# EAGLE board screen.brd123 (EAGLE 9.6.1)
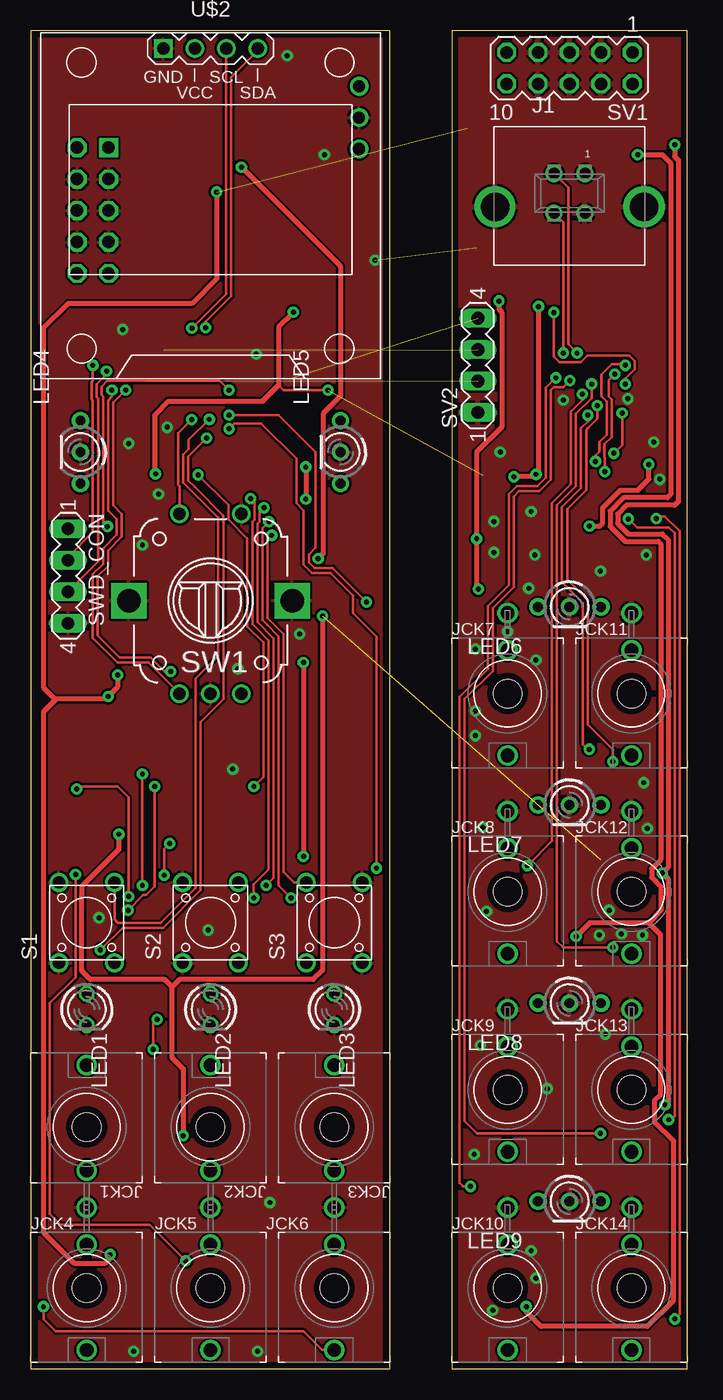
[diagram p0: board, top side]
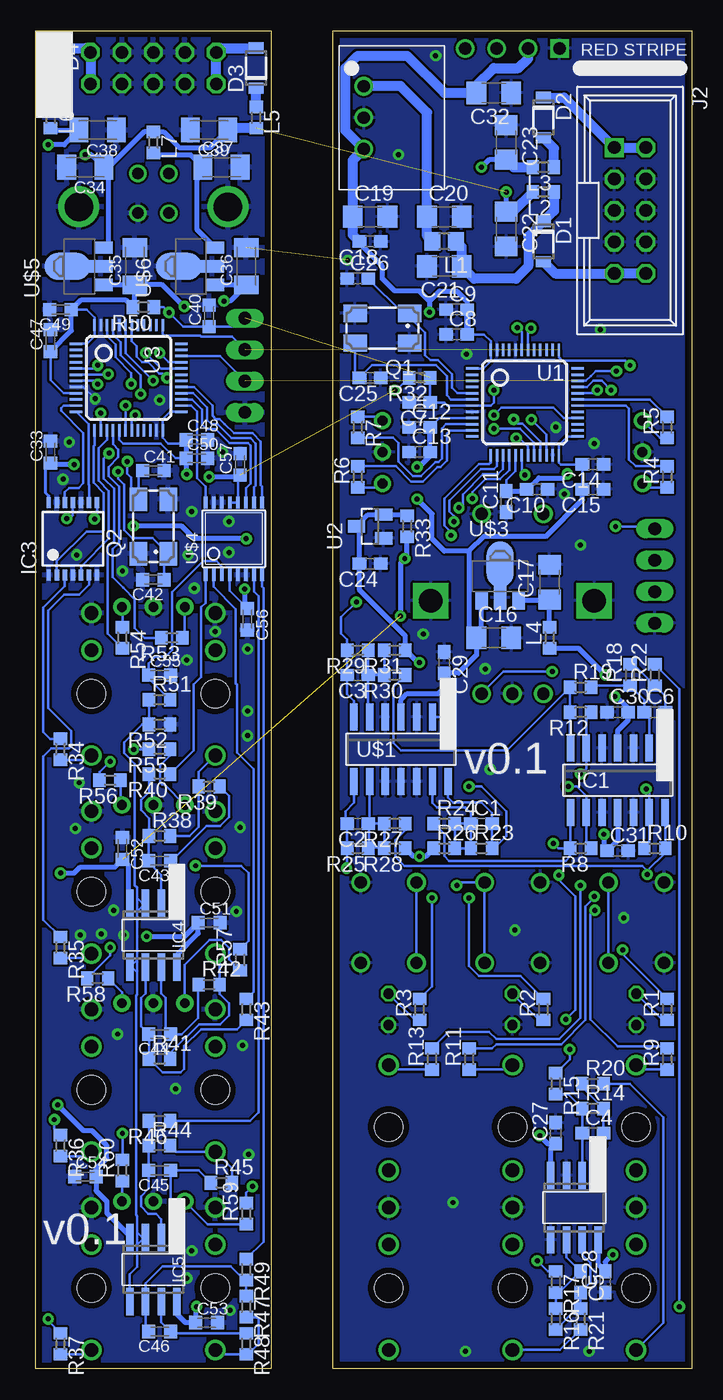
[diagram p1: board, bottom side, seen from below]

Size 53 x 108 mm. Coordinates in mm from the lower left corner, seen from the top.
Outline: 0,0 29,0 29,108 0,108 0,0
Outline: 34,0 53,0 53,108 34,108 34,0
Copper layers (1*16): Top 0.035mm / dielectric 1.5mm / Bottom 0.035mm
Design rules "PCBCart-Standard *": minimum track width 8mil, minimum drill 0.4mm, track to track 7mil, track to pad 7mil, pad to pad 7mil, via to via 7mil, smd to smd 7mil, copper to edge 20mil, drill to drill 8mil, minimum pad ring 8mil, minimum via ring 10mil, stop-mask expansion 3mil, vias tented up to drill 25mil, thermal gap 8mil
bKeepout: area 36.5,101.5 to 50.5,108

## Footprints (pad centres in the part's own frame; a part is rotated, then mirrored left to right if it is on the bottom)
C0603 = smd 1.1 x 1: 1 -0.85,0; 2 0.85,0
C1206 = smd 1.6 x 1.8: 1 -1.4,0; 2 1.4,0
C0603K = smd 1.05 x 1.08: 1 -0.875,0; 2 0.875,0
C1206K = smd 1.5 x 2: 1 -1.5,0; 2 1.5,0
SOD123FL = smd 0.91 x 1.22: A 1.625,0; C -1.625,0
SO14 = smd 0.6 x 2.2: 1 -3.81,-2.6; 2 -2.54,-2.6; 3 -1.27,-2.6; 4 0,-2.6; 5 1.27,-2.6; 6 2.54,-2.6; 7 3.81,-2.6; 8 3.81,2.6; 9 2.54,2.6; 10 1.27,2.6; 11 0,2.6; 12 -1.27,2.6; 13 -2.54,2.6; 14 -3.81,2.6
SO08 = smd 0.6 x 2.2: 1 -1.905,-2.6; 2 -0.635,-2.6; 3 0.635,-2.6; 4 1.905,-2.6; 5 1.905,2.6; 6 0.635,2.6; 7 -0.635,2.6; 8 -1.905,2.6
TSSOP14 = smd 0.35 x 0.9: 1 -1.95,-2.925; 2 -1.3,-2.925; 3 -0.65,-2.925; 4 0,-2.925; 5 0.65,-2.925; 6 1.3,-2.925; 7 1.95,-2.925; 8 1.95,2.925; 9 1.3,2.925; 10 0.65,2.925; 11 0,2.925; 12 -0.65,2.925; 13 -1.3,2.925; 14 -1.95,2.925
61400413321 = drill 0.92: 1 1.25,0; 2 -1.25,0; 3 -1.25,-3.2; 4 1.25,-3.2 | drill 2.3: SHELL -6.02,-2.7; SHELL1 6.02,-2.7
PINSHRD_PTH_2X05 = drill 1.016 square: 1 -5.08,-1.27 | drill 1.016 octagon: 2 -5.08,1.27; 3 -2.54,-1.27; 4 -2.54,1.27; 5 0,-1.27; 6 0,1.27; 7 2.54,-1.27; 8 2.54,1.27; 9 5.08,-1.27; 10 5.08,1.27
WQP-PJ301M-12_JACK = drill 1.1: P$1_TIP 0,5; P$2_SWITCH 0,-3.5; P$3_SLEEVE 0,-6.5 | hole 2.286: 0,0
R0805 = smd 1.3 x 1.5: 1 -0.95,0; 2 0.95,0
R0603 = smd 1 x 1.1: 1 -0.85,0; 2 0.85,0
LED3MM = drill 0.813 octagon: A -1.27,0; K 1.27,0
DUOLED-A-3MM = drill 0.8 pad 1.4: 1 -2.54,0; 2 0,0; 3 2.54,0
CTS406 = smd 1.9 x 1.4: 1 -2.2,-1.2; 2 2.2,-1.2; 3 2.2,1.2; 4 -2.2,1.2
TACT_SWITCH_6MM = drill 1: P$1 -3.25,-2.25; P$2 3.25,-2.25; P$3 -3.25,2.25; P$4 3.25,2.25
MA05-2 = drill 1.016 octagon: 1 -5.08,-1.27; 2 -5.08,1.27; 3 -2.54,-1.27; 4 -2.54,1.27; 5 0,-1.27; 6 0,1.27; 7 2.54,-1.27; 8 2.54,1.27; 9 5.08,-1.27; 10 5.08,1.27
MA04-1 = drill 1.016 long: 1 -3.81,0; 2 -1.27,0; 3 1.27,0; 4 3.81,0
PEC12_INCREMENTAL_ENCODER = drill 1: A -2.5,-7.5; B 2.5,-7.5; C 0,-7.5; P1 -2.5,7; P2 2.5,7 | drill 1.9 square: GND@1 -6.6,0; GND@2 6.6,0
LQFP48 = smd 1 x 0.2: 1 -4.25,2.75; 2 -4.25,2.25; 3 -4.25,1.75; 4 -4.25,1.25; 5 -4.25,0.75; 6 -4.25,0.25; 7 -4.25,-0.25; 8 -4.25,-0.75; 9 -4.25,-1.25; 10 -4.25,-1.75; 11 -4.25,-2.25; 12 -4.25,-2.75; 25 4.25,-2.75; 26 4.25,-2.25; 27 4.25,-1.75; 28 4.25,-1.25; 29 4.25,-0.75; 30 4.25,-0.25; 31 4.25,0.25; 32 4.25,0.75; 33 4.25,1.25; 34 4.25,1.75; 35 4.25,2.25; 36 4.25,2.75 | smd 0.2 x 1: 13 -2.75,-4.25; 14 -2.25,-4.25; 15 -1.75,-4.25; 16 -1.25,-4.25; 17 -0.75,-4.25; 18 -0.25,-4.25; 19 0.25,-4.25; 20 0.75,-4.25; 21 1.25,-4.25; 22 1.75,-4.25; 23 2.25,-4.25; 24 2.75,-4.25; 37 2.75,4.25; 38 2.25,4.25; 39 1.75,4.25; 40 1.25,4.25; 41 0.75,4.25; 42 0.25,4.25; 43 -0.25,4.25; 44 -0.75,4.25; 45 -1.25,4.25; 46 -1.75,4.25; 47 -2.25,4.25; 48 -2.75,4.25
SOT-23 = smd 1 x 1.4: 1 -0.95,-1.1; 2 0.95,-1.1; 3 0,1.1
TO-220_RECOM = drill 1: 1 -2.54,0; 2 0,0; 3 2.54,0
DISPLAY-OLED-128X64-I2C = drill 1 square: 1 -3.81,12.7 | drill 1: 2 -1.27,12.7; 3 1.27,12.7; 4 3.81,12.7
SOT89 = smd 1 x 1.5: 1 -1.499,-1.981; 3 1.499,-1.981 | smd 1 x 2: 2 0,-1.727 | smd 2.2 x 3.7: 2@1 0,0.94
TSSOP16 = smd 0.305 x 0.991: 1 -2.275,-2.918; 2 -1.625,-2.918; 3 -0.975,-2.918; 4 -0.325,-2.918; 5 0.325,-2.918; 6 0.975,-2.918; 7 1.625,-2.918; 8 2.275,-2.918; 9 2.275,2.918; 10 1.625,2.918; 11 0.975,2.918; 12 0.325,2.918; 13 -0.325,2.918; 14 -0.975,2.918; 15 -1.625,2.918; 16 -2.275,2.918

## Placement (x,y rotation side)
C1  18p  [C0603]  17,44 0 bottom
C2  18p  [C0603]  27,44 180 bottom
C3  18p  [C0603]  27,56 180 bottom
C4  18p  [C0603]  8,19 0 bottom
C5  18p  [C0603]  9,7 270 bottom
C6  18p  [C0603]  3,53 0 bottom
C7  0.1uF  [C0603]  22,78 180 bottom
C8  0.1uF  [C0603]  19,83.5 0 bottom
C9  0.1uF  [C0603]  19,85.5 0 bottom
C10  1uF  [C0603]  12.5,71 180 bottom
C11  1uF  [C0603]  15,70 90 bottom
C12  0.1uF  [C0603]  22,76 0 bottom
C13  1uF  [C0603]  22,74 0 bottom
C14  1uF  [C0603]  8,73 180 bottom
C15  0.1uF  [C0603]  8,71 180 bottom
C16  10uF  [C1206]  16,59 0 bottom
C17  22uF  [C1206]  11.5,63.5 90 bottom
C18  0.1uF  [C0603]  26,91 180 bottom
C19  10uF  [C1206]  26,93 0 bottom
C20  22uF  [C1206]  20,93 0 bottom
C21  22uF  [C1206]  20,89 180 bottom
C22  22uF  [C1206]  15,92 270 bottom
C23  22uF  [C1206]  15,99 270 bottom
C24  1uF  [C0603]  26,65 180 bottom
C25  18pF  [C0603]  26,80 180 bottom
C26  18pF  [C0603]  27,88 0 bottom
C27  0.1uF  [C0603]  11,19 90 bottom
C28  0.1uF  [C0603]  7,7 90 bottom
C29  0.1uF  [C0603]  20,57 270 bottom
C30  0.1uF  [C0603]  6,53 0 bottom
C31  0.1uF  [C0603]  6,41.8 0 bottom
C32  22uF  [C1206]  16,103 180 bottom
C33  0.1uF  [C0603K]  51.8,74 90 bottom
C34  22uF  [C1206K]  49,97 180 bottom
C35  22uF  [C1206K]  45,89 90 bottom
C36  22uF  [C1206K]  36,89 90 bottom
C37  22uF  [C1206K]  38,97 0 bottom
C38  22uF  [C1206K]  48,100 180 bottom
C39  22uF  [C1206K]  39,100 180 bottom
C40  0.1uF  [C0603K]  39,85 90 bottom
C41  18pF  [C0603K]  43.5,72.5 0 bottom
C42  18pF  [C0603K]  43.5,63.7 180 bottom
C43  18pF  [C0603K]  43,41 180 bottom
C44  18pF  [C0603K]  43,27 180 bottom
C45  18pF  [C0603K]  43,16 180 bottom
C46  18pF  [C0603K]  43,3 180 bottom
C47  1uF  [C0603K]  51.8,83 90 bottom
C48  1uF  [C0603K]  40,75 0 bottom
C49  1uF  [C0603K]  51,85.5 180 bottom
C50  1uF  [C0603K]  40,73.5 0 bottom
C51  0.1uF  [C0603K]  39,36 0 bottom
C52  0.1uF  [C0603K]  46,42 270 bottom
C53  0.1uF  [C0603K]  39.2,3.7 0 bottom
C54  0.1uF  [C0603K]  49,15.5 0 bottom
C55  1uF  [C0603K]  43,56 0 bottom
C56  1uF  [C0603K]  35.9,60.5 270 bottom
C57  0.1uF  [C0603K]  36.5,73 90 bottom
D1  SMF5.0AT1  [SOD123FL]  12,91 270 bottom
D2  SMF5.0AT1  [SOD123FL]  12,101 270 bottom
D3  SMF5.0AT1  [SOD123FL]  35.2,105 90 bottom
D4  SMF5.0AT1  [SOD123FL]  51.8,105 270 bottom
IC1  TL074D  [SO14]  6,47.5 180 bottom
IC2  TL072  [SO08]  9.5,13 180 bottom
IC3  74ABT125PW  [TSSOP14]  50,67 0 bottom
IC4  TL072  [SO08]  43.5,35 180 bottom
IC5  TL072  [SO08]  43.5,8 180 bottom
J1  [61400413321]  43.5,96.5 0 top
J2  CON_HEADER_2X05-PTH+SHROUDED_A  [PINSHRD_PTH_2X05]  5,93.5 270 bottom
JCK1  THONKICONNNEW  [WQP-PJ301M-12_JACK]  4.5,19.5 0 top
JCK2  THONKICONNNEW  [WQP-PJ301M-12_JACK]  14.5,19.5 0 top
JCK3  THONKICONNNEW  [WQP-PJ301M-12_JACK]  24.5,19.5 0 top
JCK4  THONKICONNNEW  [WQP-PJ301M-12_JACK]  4.5,6.5 180 top
JCK5  THONKICONNNEW  [WQP-PJ301M-12_JACK]  14.5,6.5 180 top
JCK6  THONKICONNNEW  [WQP-PJ301M-12_JACK]  24.5,6.5 180 top
JCK7  THONKICONNNEW  [WQP-PJ301M-12_JACK]  38.5,54.5 180 top
JCK8  THONKICONNNEW  [WQP-PJ301M-12_JACK]  38.5,38.5 180 top
JCK9  THONKICONNNEW  [WQP-PJ301M-12_JACK]  38.5,22.5 180 top
JCK10  THONKICONNNEW  [WQP-PJ301M-12_JACK]  38.5,6.5 180 top
JCK11  THONKICONNNEW  [WQP-PJ301M-12_JACK]  48.5,54.5 180 top
JCK12  THONKICONNNEW  [WQP-PJ301M-12_JACK]  48.5,38.5 180 top
JCK13  THONKICONNNEW  [WQP-PJ301M-12_JACK]  48.5,22.5 180 top
JCK14  THONKICONNNEW  [WQP-PJ301M-12_JACK]  48.5,6.5 180 top
L1  33u  [R0805]  20,91 180 bottom
L2  [R0603]  12,95 180 bottom
L3  [R0603]  12,97 180 bottom
L4  [R0603]  11.5,59 90 bottom
L5  [R0603]  35.2,101 270 bottom
L6  [R0603]  51.8,101 270 bottom
L7  [R0603]  43.5,99 270 bottom
LED1  [LED3MM]  4.5,29 270 top
LED2  [LED3MM]  14.5,29 270 top
LED3  [LED3MM]  24.5,29 270 top
LED4  L-115WEGW-CA  [DUOLED-A-3MM]  4,74 90 top
LED5  L-115WEGW-CA  [DUOLED-A-3MM]  25,74 90 top
LED6  L-115WEGW-CA  [DUOLED-A-3MM]  43.5,61.5 180 top
LED7  L-115WEGW-CA  [DUOLED-A-3MM]  43.5,45.5 180 top
LED8  L-115WEGW-CA  [DUOLED-A-3MM]  43.5,29.5 180 top
LED9  L-115WEGW-CA  [DUOLED-A-3MM]  43.5,13.5 180 top
Q1  CRYSTAL  [CTS406]  25,84 180 bottom
Q2  CRYSTAL  [CTS406]  43.5,68 90 bottom
R1  270  [R0603]  2,29 90 bottom
R2  270  [R0603]  12,29 90 bottom
R3  270  [R0603]  22,29 90 bottom
R4  270  [R0603]  2,72 90 bottom
R5  270  [R0603]  2,76 90 bottom
R6  270  [R0603]  27,72 90 bottom
R7  270  [R0603]  27,76 270 bottom
R8  100k 0.1%  [R0603]  9,42 180 bottom
R9  100k 0.1%  [R0603]  2,25 90 bottom
R10  100k 0.1%  [R0603]  3,42 0 bottom
R11  100k 0.1%  [R0603]  18,25 90 bottom
R12  100k 0.1%  [R0603]  9,53 180 bottom
R13  100k 0.1%  [R0603]  21,25 90 bottom
R14  100k 0.1%  [R0603]  8,21 0 bottom
R15  100k 0.1%  [R0603]  11,23 270 bottom
R16  100k 0.1%  [R0603]  11,4 270 bottom
R17  100k 0.1%  [R0603]  11,7 270 bottom
R18  100k 0.1%  [R0603]  5,56 90 bottom
R19  100k 0.1%  [R0603]  9,55 0 bottom
R20  1k  [R0603]  8,23 0 bottom
R21  1k  [R0603]  9,4 270 bottom
R22  1k  [R0603]  3,56 90 bottom
R23  20k  [R0603]  17,42 0 bottom
R24  120k  [R0603]  20,44 0 bottom
R25  20k  [R0603]  27,42 180 bottom
R26  120k  [R0603]  20,42 0 bottom
R27  120k  [R0603]  24,44 180 bottom
R28  120k  [R0603]  24,42 180 bottom
R29  20k  [R0603]  27,58 180 bottom
R30  120k  [R0603]  24,56 180 bottom
R31  120k  [R0603]  24,58 180 bottom
R32  10k  [R0603]  22,80 180 bottom
R33  4.7k  [R0603]  23,68 270 bottom
R34  1k  [R0603]  51,50 270 bottom
R35  1k  [R0603]  51,34 270 bottom
R36  1k  [R0603]  51,18 270 bottom
R37  1k  [R0603]  51,2 270 bottom
R38  100k  [R0603]  43,43 0 bottom
R39  1k  [R0603]  39,47 180 bottom
R40  39k  [R0603]  43,48 180 bottom
R41  100k  [R0603]  43,25 0 bottom
R42  1k  [R0603]  39,31 0 bottom
R43  39k  [R0603]  36,29 270 bottom
R44  100k  [R0603]  43,18 0 bottom
R45  1k  [R0603]  38,15 0 bottom
R46  39k  [R0603]  43,20 180 bottom
R47  100k  [R0603]  36,5 270 bottom
R48  1k  [R0603]  36,2 270 bottom
R49  39k  [R0603]  36,8 270 bottom
R50  1k  [R0603]  44.3,85.7 180 bottom
R51  100k  [R0603]  43,54 0 bottom
R52  100k  [R0603]  43,52 180 bottom
R53  270  [R0603]  42,59 180 bottom
R54  270  [R0603]  46,59 270 bottom
R55  270  [R0603]  43,50 180 bottom
R56  270  [R0603]  47,47.5 180 bottom
R57  270  [R0603]  36.5,33 90 bottom
R58  270  [R0603]  48,31.5 180 bottom
R59  270  [R0603]  36,12.5 90 bottom
R60  270  [R0603]  46,16 90 bottom
S1  TACT_SWITCH_6MM  [TACT_SWITCH_6MM]  4.5,36 90 top
S2  TACT_SWITCH_6MM  [TACT_SWITCH_6MM]  14.5,36 90 top
S3  TACT_SWITCH_6MM  [TACT_SWITCH_6MM]  24.5,36 90 top
SV1  [MA05-2]  43.5,105 180 top
SV2  [MA04-1]  36.1,81 90 top
SW1  ENCODER_SW1-PEC12  [PEC12_INCREMENTAL_ENCODER]  14.5,62 0 top
SWD_CON  [MA04-1]  3,64 270 top
U1  STM32F373LQFP48  [LQFP48]  13.5,78 0 bottom
U2  IC_LM4040  [SOT-23]  26,68 90 bottom
U3  STM32F373LQFP48  [LQFP48]  45.5,80 0 bottom
U5  R-78E-0.5  [TO-220_RECOM]  26.5,101 270 bottom
U$1  MCP6004  [SO14]  23.5,50 180 bottom
U$2  DISPLAY-OLED-128X64-I2C  [DISPLAY-OLED-128X64-I2C]  14.5,93.9 0 top
U$3  LD2981ABUSOT89  [SOT89]  15.5,64 0 bottom
U$4  DAC8565  [TSSOP16]  37,67 0 bottom
U$5  LD2981ABUSOT89  [SOT89]  49.5,89 90 bottom
U$6  LD2981ABUSOT89  [SOT89]  40.5,89 90 bottom

## Library data of the parts
C1-C57 L1-L7 R1-R60 = resistor
D1-D4 = diode
IC1 IC2 IC4 IC5 U$1 = EurorackModularParts
IC3 = 74xx-eu
J1 = Wurth_Elektronik_Electromechanic_Input-Output_Connectors_rev19a
J2 = dp_devices
JCK1-JCK14 Q1 Q2 S1-S3 U1 U3 U5 U$3-U$6 = BitFox
LED1-LED9 = led
SV1 SV2 SWD_CON = con-lstb; OC_FARNELL: unknown; OC_NEWARK: unknown
SW1 U2 = dp_devices.v6
U$2 = diy-modules

## Nets
+5V: C33.1 C36.1 C56.1 IC3.14 U$4.4 U$6.1
+12V: C22.1 C28.2 C30.2 C34.1 C39.1 C51.1 C53.1 IC1.4 IC2.8 IC4.8 IC5.8 L2.2 L4.1 L5.2 L7.1 U$5.3
-12V: C23.2 C27.1 C31.1 C38.2 C52.2 C54.2 IC1.11 IC2.4 IC4.4 IC5.4 L3.2 L6.2 R33.2
ENC_A: SW1.B U1.32
ENC_B: SW1.A U1.33
ENC_SW: SW1.P1 U1.22
GATE_1: IC3.2 U3.13
GATE_2: IC3.5 U3.15
GATE_3: IC3.9 U3.12
GATE_4: IC3.12 U3.11
GLED_1: R4.2 U1.30
GLED_2: R6.2 U1.11
GND: C7.2 C8.1 C9.1 C10.1 C11.1 C12.1 C13.1 C14.1 C15.1 C16.2 C17.2 C18.1 C19.2 C20.2 C21.2 C22.2 C23.1 C24.1 C25.1 C26.1 C27.2 C28.1 C29.1 C30.1 C31.2 C32.1 C33.2 C34.2 C35.2 C36.2 C37.2 C38.1 C39.2 C40.2 C41.2 C42.2 C47.2 C48.2 C49.2 C50.2 C51.2 C52.1 C53.2 C54.1 C55.2 C56.2 C57.2 IC1.3 IC1.5 IC1.10 IC1.12 IC2.3 IC2.5 IC3.1 IC3.4 IC3.7 IC3.10 IC3.13 J1.4 J1.SHELL J1.SHELL1 J2.3 J2.4 J2.5 J2.6 J2.7 J2.8 JCK1.P$3_SLEEVE JCK2.P$3_SLEEVE JCK3.P$3_SLEEVE JCK4.P$3_SLEEVE JCK5.P$3_SLEEVE JCK6.P$3_SLEEVE JCK7.P$3_SLEEVE JCK8.P$3_SLEEVE JCK9.P$3_SLEEVE JCK10.P$3_SLEEVE JCK11.P$3_SLEEVE JCK12.P$3_SLEEVE JCK13.P$3_SLEEVE JCK14.P$3_SLEEVE LED1.K LED2.K LED3.K LED4.2 LED5.2 LED6.2 LED7.2 LED8.2 LED9.2 Q1.2 Q1.4 Q2.2 Q2.4 R52.1 S1.P$3 S1.P$4 S2.P$3 S2.P$4 S3.P$1 S3.P$2 SV1.3 SV1.4 SV1.5 SV1.6 SV1.7 SV1.8 SV2.1 SW1.C SW1.GND@1 SW1.GND@2 SW1.P2 SWD_CON.4 U1.8 U1.23 U1.44 U1.47 U2.1 U3.8 U3.23 U3.44 U3.47 U5.2 U$1.3 U$1.5 U$1.10 U$1.11 U$1.12 U$2.1 U$3.2 U$3.2@1 U$4.5 U$4.6 U$4.14 U$4.15 U$5.2 U$5.2@1 U$6.2 U$6.2@1
L1G: R54.2 U3.14
L1R: R53.2 U3.16
L2G: R56.2 U3.18
L2R: R55.2 U3.19
L3G: R58.2 U3.46
L3R: R57.2 U3.45
L4G: R60.2 U3.43
L4R: R59.2 U3.42
LED_1: R1.2 U1.19
LED_2: R2.2 U1.16
LED_3: R3.2 U1.14
N$1: IC1.9 R8.1 R9.2
N$2: IC1.13 R10.1 R11.2
N$3: LED1.A R1.1
N$4: LED2.A R2.1
N$5: LED3.A R3.1
N$6: LED4.1 R4.1
N$7: LED4.3 R5.1
N$8: C25.2 Q1.3 U1.6
N$9: C6.2 IC1.1 R18.2 R22.1
N$10: C1.1 R23.1 R24.2 R26.2 U$1.13
N$11: D2.C J2.1 J2.2
N$12: LED5.1 R6.1
N$13: LED5.3 R7.1
N$14: JCK1.P$1_TIP R9.1
N$15: JCK2.P$1_TIP R11.1
N$16: IC1.6 R12.1 R13.2
N$17: C4.2 IC2.1 R14.2 R20.1
N$18: JCK3.P$1_TIP R13.1
N$19: C4.1 IC2.2 R14.1 R15.2
N$20: U$1.1 U$1.2
N$21: C5.2 IC2.7 R16.2 R21.1
N$22: C5.1 IC2.6 R16.1 R17.2
N$23: C2.1 R25.1 R27.2 R28.2 U$1.9
N$24: IC3.3 R34.1
N$25: C6.1 IC1.2 R18.1 R19.2
N$26: D1.A J2.9 J2.10
N$27: C3.1 R29.1 R30.2 R31.2 U$1.6
N$28: JCK5.P$1_TIP R21.2
N$29: JCK4.P$1_TIP R20.2
N$30: JCK6.P$1_TIP R22.2
N$31: C21.1 D1.C L1.1 L2.1
N$32: C26.2 Q1.1 U1.5
N$33: C20.1 L1.2 U5.1
N$34: IC3.6 R35.1
N$35: IC3.8 R36.1
N$36: IC3.11 R37.1
N$37: JCK11.P$1_TIP R34.2
N$38: JCK12.P$1_TIP R35.2
N$39: JCK13.P$1_TIP R36.2
N$40: JCK14.P$1_TIP R37.2
N$41: C37.1 L7.2 U$6.3
N$42: D3.C L5.1
N$43: C17.1 L4.2 U$3.3
N$44: D2.A L3.1
N$45: D4.A L6.1
N$46: D4.C SV1.1 SV1.2
N$47: D3.A SV1.9 SV1.10
N$48: LED7.1 R56.1
N$49: LED7.3 R55.1
N$50: LED6.1 R54.1
N$51: LED6.3 R53.1
N$52: LED9.3 R59.1
N$53: LED9.1 R60.1
N$54: LED8.1 R58.1
N$55: LED8.3 R57.1
N$56: C42.1 Q2.1 U3.6
N$57: C41.1 Q2.3 U3.5
N$58: C43.2 IC4.2 R38.1 R40.2
N$59: C43.1 IC4.1 R39.1
N$60: JCK7.P$1_TIP R38.2 R39.2
N$61: C44.2 IC4.6 R41.1 R43.2
N$62: C44.1 IC4.7 R42.1
N$63: JCK8.P$1_TIP R41.2 R42.2
N$64: C45.2 IC5.2 R44.1 R46.2
N$65: C45.1 IC5.1 R45.1
N$66: JCK9.P$1_TIP R44.2 R45.2
N$67: C46.2 IC5.6 R47.1 R49.2
N$68: C46.1 IC5.7 R48.1
N$69: JCK10.P$1_TIP R47.2 R48.2
N$70: C55.1 R51.2 U$4.3
OUTA: R40.1 U$4.1
OUTB: R43.1 U$4.2
OUTC: R46.1 U$4.7
OUTD: R49.1 U$4.8
REF_BIAS: IC4.3 IC4.5 IC5.3 IC5.5 R51.1 R52.2
RESET: C7.1 C40.1 R32.1 R50.1 SV2.4 SWD_CON.1 U1.7 U3.7
RLED_1: R5.2 U1.31
RLED_2: R7.2 U1.10
SCR_SCL: U1.42 U$2.3
SCR_SDA: U1.43 U$2.4
SDADC_1: C1.2 R23.2 U1.18 U$1.14
SDADC_2: C2.2 R25.2 U1.20 U$1.8
SDADC_3: C3.2 R29.2 U1.28 U$1.7
SIGNAL_1: IC1.8 R8.2 R15.1 R24.1
SIGNAL_2: IC1.14 R10.2 R17.1 R27.1
SIGNAL_3: IC1.7 R12.2 R19.1 R30.1
SPI_LDAC: U3.26 U$4.16
SPI_MOSI: U3.27 U$4.11
SPI_SCK: U3.28 U$4.10
SPI_SYNC: U3.29 U$4.9
SW_1: S1.P$1 S1.P$2 U1.21
SW_2: S2.P$1 S2.P$2 U1.15
SW_3: S3.P$3 S3.P$4 U1.13
SWCLK: SV2.3 SWD_CON.2 U1.37 U3.37
SWDIO: SV2.2 SWD_CON.3 U1.34 U3.34
USB_DM: J1.2 U3.32
USB_DP: J1.3 U3.33
VCC: C12.2 C13.2 C14.2 C15.2 C16.1 C29.2 U1.9 U1.24 U1.25 U$1.4 U$3.1
VCCIO: C8.2 C9.2 C10.2 C11.2 C18.2 C19.1 C32.2 C35.1 C47.1 C48.1 C49.1 C50.1 C57.1 R32.2 R50.2 U1.1 U1.17 U1.48 U3.1 U3.9 U3.17 U3.24 U3.25 U3.48 U5.3 U$2.2 U$4.12 U$4.13 U$5.1
VREF_-10: C24.2 R26.1 R28.1 R31.1 R33.1 U2.2 U2.3

## Tracks (layer width: path | path; a pad name or v marks a point on that pad's centre or on a via)
+5V  (via drill 0.4)
  Top 0.406: v37.8,86.2 37.8,85.52 38.03,85.29 38.03,76.03 36,74 v36,67 36,63.06 v36.13,62.93 | v49.91,73 49.91,71.81 49.02,70.92 47.59,70.92 46.18,69.5 46.18,68.28 45.91,68.01 v45.12,68.01
  Bottom 0.203: C56.1 37.33,62.8 U$4.4
  Bottom 0.254: IC3.14 51.95,70.45 52.2,70.7 52.2,72.72 C33.1
  Bottom 0.406: U$6.1 C36.1 37.3,86.2 v37.8,86.2 | v36.13,62.93 36.13,61.61 C56.1 | v36,67 40.2,67 41.21,68.01 v45.12,68.01 | v49.91,73 51.67,73 C33.1
+12V  (via drill 0.4)  (1 unrouted)
  Top 0.406: v15,95 15,88 13,86 3,86 1,84 1,55 1.94,54.06 | 1.94,54.06 1.94,53.94 1,53 1,11 3.5,8.5 6,8.5 6.4,8.9 v6.4,9.2 | v7,56 7,55.03 v6.24,54.27 6.04,54.06 1.94,54.06 | v49,98 51,98 51.68,97.32 51.68,70.58 51.41,70.31 47.85,70.31 46.79,69.25 46.79,67.99 48,66.78 50.68,66.78 50.87,66.6 50.87,41.08 50.14,40.36 50.14,39.64 50.89,38.89 50.89,37 49.89,36 | v40,5 40,4.6 41.2,3.4 49.8,3.4 51.88,5.48 51.88,18.42 50.37,19.93 50.37,21.66 50.87,22.16 50.87,35.02 49.89,36 | v44.04,34.9 45.14,36 49.89,36
  Bottom 0.406: IC1.4 6,51.5 5.15,52.35 C30.2 5.15,53.28 6.13,54.27 v6.24,54.27 | C22.1 v15,95 | v7,56 9.15,58.15 L4.1 | IC2.8 7.59,8.45 C28.2 7,8.6 v6.4,9.2 | C39.1 38.91,98.59 41.42,98.59 42.67,99.85 L7.1 44.25,99.85 47.1,97 | 47.1,97 C34.1 48.5,98 v49,98 | U$5.3 47.1,90.92 47.1,97 | v44.04,34.9 40.98,34.9 C51.1 39.88,35.12 41.59,33.41 IC4.8 | IC5.8 41.59,4.39 40.9,3.7 C53.1 40.08,4.92 v40,5
  Bottom 0.813: L2.2 14.45,93.4 C22.1 | L5.2 37.35,100.15 C39.1
-12V  (via drill 0.4)  (1 unrouted)
  Top 0.406: v23.2,65.4 23.6,65.8 23.6,77.1 25,78.5 25,89 v17,97 | v23.54,60.76 23.54,32.14 23.5,32.1 22.8,31.4 12,31.4 11.4,30.8 | v12.3,18.8 12.3,24.2 11.4,25.1 11.4,30.8 | 11.4,30.8 10.8,31.4 4.8,31.4 4.11,32.09 4.11,32.2 4.11,38.2 4.11,38.91 7.1,41.9 v7.1,43.14 | v51.23,21.3 51.48,21.55 51.48,39.52 v51,40 51.48,40.48 51.48,66.92 51.01,67.39 48.25,67.39 47.4,68.24 47.4,69 48.1,69.7 51.99,69.7 52.29,70 52.29,97.57 52,97.86 v52,98.8
  Bottom 0.406: C23.2 16.4,97.6 v17,97 | IC2.4 11.4,17.75 C27.1 11.65,18.15 v12.3,18.8 | R33.2 23,65.6 v23.2,65.4 23.54,65.06 v23.54,60.76 | IC1.11 6,42.65 C31.1 7.1,42.05 v7.1,43.14 | L6.2 51.65,100 C38.2 50.7,98.8 v52,98.8 | v51,40 49.9,40 49.4,40.5 46.62,40.5 C52.2 45.51,40.63 45.51,37.7 IC4.4 | v51.23,21.3 49.12,19.2 48.46,19.2 47.27,18.01 47.27,16.99 48.12,16.13 C54.2 48.12,14.37 47.27,13.51 47.27,12.57 45.41,10.71 IC5.4
  Bottom 0.813: C23.2 14.4,97 L3.2
ENC_A  (via drill 0.4)
  Top 0.203: v11.29,56.29 10.79,56.29 9.67,57.41 7.17,57.41 5.41,59.17 5.41,63.99 6.22,64.81 6.22,66.05 7.33,67.16 7.33,69 6.63,69.7 6.63,78 v7.64,79.01
  Bottom 0.203: SW1.B 15.21,56.29 v11.29,56.29 | U1.32 7.94,78.75 7.68,79.01 v7.64,79.01
ENC_B  (via drill 0.4)
  Top 0.203: SW1.A 9.5,57 7,57 5,59 5,64.16 5.82,64.97 5.82,66.22 6.93,67.33 6.93,68.57 6.22,69.28 6.22,78.16 6.53,78.47 v6.53,79.01
  Bottom 0.203: 9,79.25 U1.33 | 9,79.25 8.47,79.25 | 8.47,79.25 7.96,79.77 7.29,79.77 v6.53,79.01 | 9,79.25 8.47,79.25
ENC_SW  (via drill 0.4)
  Top 0.203: SW1.P1 12,71.26 11.89,71.38 11.89,75.53 v12.98,76.62
  Bottom 0.203: v12.98,76.62 11.75,75.4 U1.22
GATE_1
  Bottom 0.203: IC3.2 51.3,65.2 48.9,67.6 47.6,67.6 47.5,67.7 47.5,68 47.5,70.7 48.34,71.54 48.34,74.48 48.25,74.57 U3.13
GATE_2
  Bottom 0.203: U3.15 47.25,74.99 47.93,74.31 47.93,71.7 47.09,70.87 47.09,67 47.1,67 49.35,64.75 IC3.5
GATE_3
  Bottom 0.203: U3.12 48.74,76.24 48.74,71.37 48.7,71.33 IC3.9
GATE_4
  Bottom 0.203: U3.11 50.75,77.75 50.95,77.55 50.95,77.36 49.15,75.55 49.15,71.5 49.55,71.1 50.3,71.1 50.65,70.75 IC3.12
GLED_1
  Bottom 0.203: U1.30 5.35,77.75 5.1,77.5 5.1,73.4 4.55,72.85 R4.2
GLED_2
  Bottom 0.203: U1.11 19.55,75.75 19.79,75.51 19.79,73.3 20.3,72.79 20.56,72.79 21.72,71.64 22.68,71.64 23.9,72.85 R6.2
GND  (via drill 0.4)  (1 unrouted)
  Bottom 0.203: v48.2,78.3 49.15,79.25 U3.8
  other vias: 11,76 10.3,70.6 7.9,74.7 9,66.5 16.3,48.4 21.7,59.3 18.3,1.4 8.3,1.4 19.3,13.4 14.3,35.4 7.4,83.9 20.7,106 5.5,36.4 18.2,81.9 23.7,98 27.8,89.5 16.7,56.5 37.9,74 35.9,58.1 43,78.2 36.5,43.7 36.3,26.1 41.7,22.6 35.8,17.3 40.4,9.5 40.8,7.3 50.3,74.8 50.8,71.8 46,64.4 49.7,65.7 37.3,4.7 35.9,53.1 35.9,51.1 40.4,69.2 37.4,68.4 37.4,65.9 36.8,36.9 49.5,47.3 46.4,27 38.5,59.5 40.8,57.2 40.2,63 40.7,65.7 49.4,35 46.7,37 47.7,35.1 49.8,43.6 45.9,35
  pour Bottom: 29,0 0,0 0,108 29,108
  pour Top: 29,0 0,0 0,108 29,108
  pour Bottom: 53,108 53,0 34,0 34,108
  pour Top: 53,108 53,0 34,0 34,108
L1G  (via drill 0.4)
  Top 0.203: v47.09,73.9 47.75,74.57 v47.75,77.15
  Bottom 0.203: R54.2 47.2,59.35 47.2,63 47.2,66.32 46.69,66.83 46.69,71 46.69,71.04 47.52,71.87 47.52,73.46 v47.09,73.9 | v47.75,77.15 U3.14
L1R
  Bottom 0.203: U3.16 46.75,74.64 46.33,74.22 46.33,73.59 47.12,72.8 47.12,72.04 46.28,71.2 46.28,66.66 46.79,66.15 46.79,63.89 45.95,63.05 45,62.1 45,59.8 44.2,59 R53.2
L2G  (via drill 0.4)
  Top 0.203: v47,49 47,50 45,52 45,62 43.31,63.69 43.31,69.38 44.84,70.92 44.84,75.77 45.04,75.96 45.76,76.68 v45.76,77.76
  Bottom 0.203: v47,49 47.85,48.15 R56.2 | U3.18 v45.75,77.75 v45.76,77.76
L2R  (via drill 0.4)
  Top 0.203: v44.97,76.97 44.97,76.47 44.44,75.94 44.44,71.08 42.9,69.55 42.9,63.52 44.59,61.83 44.59,50.41 45,50 v45.1,50
  Bottom 0.203: U3.19 45.25,76.69 v44.97,76.97 | v45.1,50 R55.2
L3G  (via drill 0.4)
  Top 0.203: v45.29,79.5 45.29,78.36 44.03,77.1 44.03,71.25 42.49,69.72 42.49,46 42.5,45.99 42.5,45.92 42.49,45.92 42.49,34.51 43,34 v47,34
  Bottom 0.203: U3.46 47.25,83.38 46.56,82.69 46.56,81.65 45.29,80.38 v45.29,79.5 | R58.2 47,33.35 v47,34
L3R  (via drill 0.4)
  Top 0.203: v44.53,78.68 44.53,78.18 43.62,77.27 43.62,71.42 42.09,69.89 42.09,42.59 v40.1,40.6
  Bottom 0.203: U3.45 46.75,83.45 46.16,82.86 46.16,81.82 44.53,80.2 v44.53,78.68 | R57.2 35.8,34.55 35.8,40 36.4,40.6 v40.1,40.6
L4G  (via drill 0.4)
  Top 0.203: v43.52,79.76 42.99,79.23 42.22,79.23 42.01,79.02 42.01,71.76 41.08,70.83 39.41,70.83 39,70.42 39,63.1 37.3,61.4 37.3,56.33 35.02,54.04 35.02,20 36.02,19 v46,19
  Bottom 0.203: U3.43 45.75,81.99 v43.52,79.76 | R60.2 v46,19
L4R  (via drill 0.4)
  Top 0.203: v42.41,79.99 41.6,79.18 41.6,71.93 40.91,71.24 39.24,71.24 38.59,70.59 38.59,63.27 36.89,61.57 36.89,56.49 34.61,54.21 34.61,15 34.91,14.7 v35.5,14.7
  Bottom 0.203: U3.42 45.25,82.95 44.87,82.57 44.87,81.69 44.43,81.24 43.93,81.24 43.03,80.34 42.76,80.34 v42.41,79.99 | v35.5,14.7 36,14.2 R59.2
LED_1  (via drill 0.4)
  Top 0.203: v5.6,33.8 7.39,35.59 10.66,35.59 13.71,38.65 13.71,52.22 15.55,54.06 15.55,68.38 15.54,68.39 15.54,68.87 13.21,71.21 12.7,71.71 12.7,73.63 v14.19,75.12
  Bottom 0.203: R1.2 5.6,33.45 v5.6,33.8 | U1.19 13.25,74.45 13.92,75.12 v14.19,75.12
LED_2  (via drill 0.4)
  Top 0.203: v18,38 18,39.1 19.19,40.29 19.19,58.79 17.88,60.09 17.88,68.39 18.05,68.56 18.05,69.94 v17.75,70.25
  Bottom 0.203: R2.2 13.85,31.7 17.19,31.7 18,32.51 v18,38 | U1.16 14.75,72.55 15.5,71.8 16.7,71.8 17.75,70.75 v17.75,70.25
LED_3  (via drill 0.4)
  Top 0.203: v21,38 20,39 20,59.12 19.06,60.06 | 19.06,60.06 18.69,60.43 | 19.06,60.06 18.69,60.43 | 18.69,60.43 18.69,67.86 v19.22,68.39
  Bottom 0.203: R3.2 21,30.85 v21,38 | U1.14 15.75,72.86 16,72.61 17.04,72.61 19.57,70.08 19.57,69.19 19.22,68.83 v19.22,68.39
N$1  (via drill 0.4)
  Top 0.203: v7.83,37 9.08,38.24 9.31,38.24 10,38.93 v10,47
  Bottom 0.203: R8.1 8.54,42.39 IC1.9 8.54,46.24 9.3,47 v10,47 | R9.2 2.15,26 6,26 8.19,28.19 8.19,36.65 v7.83,37
N$2  (via drill 0.4)
  Top 0.203: v7.88,38.12 7.88,46.12 7,47 3.9,47 v3.7,46.8
  Bottom 0.203: R10.1 3.46,42.39 IC1.13 3.46,46.56 v3.7,46.8 | R11.2 16.15,25.85 15.81,26.19 15.7,26.19 10.53,26.19 8.59,28.13 8.59,30 8.59,37 8.59,37.31 7.88,38.03 v7.88,38.12
N$3
  Bottom 0.203: LED1.A 2.38,28.15 R1.1
N$4
  Bottom 0.203: LED2.A 12.38,28.15 R2.1
N$5
  Bottom 0.203: LED3.A 22.38,28.15 R3.1
N$6
  Bottom 0.203: R4.1 3.69,71.15 LED4.1
N$7
  Bottom 0.203: LED4.3 2.61,75.15 R5.1
N$8
  Bottom 0.203: U1.6 19.45,78.25 19.79,78.59 19.79,80.12 20.67,81 25.85,81 C25.2 | 26.93,80.08 27.2,80.35 Q1.3
  Bottom 0.305: 26.93,80.08 C25.2
N$9
  Bottom 0.203: IC1.1 2.15,50.14 C6.2 2.15,54.3 R22.1 4.7,56.85 R18.2
N$10
  Bottom 0.203: C1.1 R24.2 R26.2 R23.1 C1.1 | C1.1 17.85,44.85 18.2,45.2 18.3,45.3 20.6,45.3 20.96,45.66 U$1.13
N$11
  Bottom 0.813: D2.C 10.31,102.62 J2.1 J2.2
N$12
  Bottom 0.203: R6.1 25.31,71.15 LED5.1
N$13
  Bottom 0.203: R7.1 25.31,76.85 LED5.3
N$14
  Bottom 0.203: R9.1 4.15,24.15 JCK1.P$1_TIP
N$15
  Bottom 0.203: R11.1 14.85,24.15 JCK2.P$1_TIP
N$16  (via drill 0.4)
  Top 0.203: v9,39 v9,48
  Bottom 0.203: R12.1 8.54,52.61 IC1.6 8.54,48.46 v9,48 | R13.2 19.65,27.2 16.4,27.2 15.8,26.6 10.7,26.6 9,28.3 v9,39
N$17
  Bottom 0.203: IC2.1 7.59,17.41 7,18 7,18.85 C4.2 R14.2 8.85,22.7 R20.1
N$18
  Bottom 0.203: JCK3.P$1_TIP 24.15,24.15 R13.1
N$19
  Bottom 0.203: IC2.2 8.87,18.98 C4.1 | C4.1 9,19 | R15.2 10,22.15 R14.1 C4.1
N$20
  Bottom 0.203: U$1.2 U$1.1
N$21
  Bottom 0.203: IC2.7 8.87,9.2 8.2,8.53 8.2,6.96 C5.2 | C5.2 8.65,6.15 | R16.2 9.3,4.85 R21.1 C5.2
N$22
  Bottom 0.203: R16.1 R17.2 10.7,6.15 C5.1 10.13,8.98 IC2.6
N$23
  Bottom 0.203: 26.07,44.08 C2.1 R27.2 R28.2 24.93,42.08 26.07,42.08 | 26.07,44.08 26.04,44.11 U$1.9 | R25.1 26.07,42.08 | 26.07,42.08 26.07,44.08
N$24
  Bottom 0.203: IC3.3 50.65,63.17 52.39,61.43 52.39,51.39 51.85,50.85 R34.1
N$25
  Bottom 0.203: IC1.2 3.46,52.61 C6.1 3.85,54 R18.1 8,55.15 R19.2
N$26
  Bottom 0.813: D1.A 11.04,88.42 J2.9 J2.10
N$27
  Bottom 0.203: C3.1 26.15,52.71 U$1.6 | C3.1 R29.1 | R31.2 R30.2 C3.1
N$28
  Bottom 0.203: R21.2 10.65,1.5 JCK5.P$1_TIP
N$29
  Bottom 0.203: JCK4.P$1_TIP 2.3,3.7 2.3,20.3 5,23 R20.2
N$30  (via drill 0.4)
  Top 0.203: JCK6.P$1_TIP 23.5,1.5 22,3 2,3 1.01,3.99 v1.01,5
  Bottom 0.203: v1.01,5 1.01,54.86 R22.2
N$31
  Bottom 0.813: L2.1 11.15,93.47 D1.C 13.22,91.41 13.22,89 14.22,88 17.6,88 C21.1 18.6,90.55 L1.1
N$32
  Bottom 0.203: U1.5 18.94,78.75 19.39,79.2 19.39,80.29 20.5,81.41 21.11,81.41 21.55,81.84 21.55,83.63 22.8,84.88 Q1.1 23.35,85.2 C26.2
N$33
  Bottom 0.813: L1.2 21.4,91.45 C20.1 21.4,101.4 23.54,103.54 U5.1
N$34
  Bottom 0.203: IC3.6 48.7,63.3 49.5,62.5 50.7,62.5 51.98,61.22 51.98,53.31 50.15,51.48 50.15,50.22 50.32,50.05 51.74,50.05 52.39,49.4 52.39,36.24 R35.1
N$35  (via drill 0.4)
  Top 0.203: v48.26,68.6 48.96,67.9 50,67.9 51.52,67.9 51.98,67.44 51.98,20.35 51.73,20.1 v51.5,20.1
  Bottom 0.203: IC3.8 48.05,68.81 v48.26,68.6 | v51.5,20.1 51.5,19.35 R36.1
N$36  (via drill 0.4)
  Top 0.203: v52,4 52.39,4.39 52.39,67.61 51.2,68.8 50.67,68.8 v50.5,68.63
  Bottom 0.203: IC3.11 50,68.9 50.27,68.63 v50.5,68.63 | v52,4 52,3.85 R37.1
N$37
  Bottom 0.203: R34.2 48.85,49.15 JCK11.P$1_TIP
N$38
  Bottom 0.203: R35.2 48.85,33.15 JCK12.P$1_TIP
N$39
  Bottom 0.203: R36.2 48.85,17.15 JCK13.P$1_TIP
N$40
  Bottom 0.203: R37.2 48.85,1.15 JCK14.P$1_TIP
N$41
  Bottom 0.406: L7.2 43.33,97.98 40.48,97.98 C37.1 39.5,96.5 40,96 40,91.98 U$6.3
N$42
  Bottom 0.813: L5.1 D3.C
N$43
  Bottom 0.406: L4.2 C17.1 11.58,62.02 U$3.3
N$44
  Bottom 0.813: L3.1 11.15,98.53 D2.A
N$45
  Bottom 0.813: D4.A L6.1
N$46
  Bottom 0.813: D4.C 48.94,106.62 SV1.1 SV1.2
N$47
  Bottom 0.813: D3.A 38.06,106.62 SV1.9 SV1.10
N$48
  Bottom 0.203: R56.1 46.15,45.61 LED7.1
N$49
  Bottom 0.203: R55.1 42.15,49.48 42.95,48.68 42.95,47.32 42.78,47.15 42.6,47.15 LED7.3
N$50
  Bottom 0.203: R54.1 46,61.46 LED6.1
N$51
  Bottom 0.203: R53.1 40.96,59.19 LED6.3
N$52
  Bottom 0.203: LED9.3 39.11,11.65 R59.1
N$53
  Bottom 0.203: R60.1 46.04,15.11 LED9.1
N$54
  Bottom 0.203: R58.1 46.04,30.39 LED8.1
N$55
  Bottom 0.203: R57.1 37.4,33.05 37.4,33.96 38.04,34.6 38.96,34.6 40.96,32.6 LED8.3
N$56  (via drill 0.4)
  Top 0.203: v46.36,72.43 46.36,73 46.36,73.56 46.33,73.59 46.33,74.63 46.92,75.22 46.92,78.24 46.68,78.48 46.68,79.81 v47.15,80.28
  Bottom 0.203: C42.1 42.62,65.47 Q2.1 43.55,67.06 45.23,67.06 45.87,67.7 45.87,71.37 46.36,71.86 v46.36,72.43 | U3.6 47.19,80.25 v47.15,80.28
N$57  (via drill 0.4)
  Top 0.203: v45.6,73.24 45.6,73.7 45.92,74.02 45.92,74.82 46.52,75.42 46.52,78.07 46.05,78.54 46.05,80.25 46.9,81.1 47.91,81.1 v48,81.01
  Bottom 0.203: C41.1 44.7,72.17 Q2.3 45.3,70.8 45.3,71.94 45.6,72.24 v45.6,73.24 | U3.5 48.26,80.75 v48,81.01
N$58
  Bottom 0.203: IC4.2 42.87,39.87 43.88,40.88 C43.2 43.88,42.98 R38.1 43.85,44.43 44.51,45.08 44.51,45.92 43.85,46.57 R40.2
N$59
  Bottom 0.203: C43.1 42.06,40.94 | 42.06,40.94 41.59,40.47 IC4.1 | R39.1 37.37,46.22 37.37,44.53 38.1,43.8 39.2,43.8 42.06,40.94
N$60
  Bottom 0.203: JCK7.P$1_TIP 39.85,48.15 R39.2 39.85,43.73 40.58,43 R38.2
N$61
  Bottom 0.203: IC4.6 44.13,30.29 44.51,29.92 44.51,27.63 C44.2 43.85,26.98 R41.1 42.75,23.9 41.3,23.9 41,24.2 41,26.05 39.66,27.39 38,27.39 37.63,27.39 36.76,27.39 R43.2
N$62
  Bottom 0.203: IC4.7 42.87,30.29 42.49,29.92 42.49,27.37 C44.1 41.2,27 39.9,28.3 39.9,30.95 R42.1
N$63
  Bottom 0.203: R41.2 42.15,25.48 39.83,27.8 39,27.8 38.1,27.8 37.37,28.53 37.37,29.47 38.15,30.25 R42.2 38.15,33.15 JCK8.P$1_TIP
N$64
  Bottom 0.203: IC5.2 42.87,12.06 43.3,12.49 43.92,12.49 44.51,13.08 44.51,13.92 43.88,14.55 C45.2 43.88,17.98 R44.1 R46.2
N$65
  Bottom 0.203: IC5.1 41.59,11.6 42.12,12.12 C45.1 39.85,16 R45.1
N$66
  Bottom 0.203: R45.2 37.15,16.15 JCK9.P$1_TIP 41.65,17.5 R44.2
N$67
  Bottom 0.203: C46.2 44.13,3.26 IC5.6 44.13,6.87 42.75,8.25 37.25,8.25 36,7 | R47.1 36,7 | 36,7 R49.2
N$68
  Bottom 0.203: IC5.7 42.87,3.74 C46.1 41.98,2.85 R48.1
N$69
  Bottom 0.203: JCK10.P$1_TIP 38.15,1.15 R48.2 35.85,1.15 35,2 35,4 35.15,4.15 R47.2
N$70
  Bottom 0.203: R51.2 43.88,55.73 C55.1 43.88,56.1 43.88,56.92 43.3,57.5 42.5,57.5 42,58 42,59 42,62.7 39.5,65.2 38.4,65.2 37.98,64.78 U$4.3
OUTA
  Bottom 0.203: U$4.1 39.27,61.82 39.63,61.47 39.63,55.85 40.25,55.23 40.25,49.9 R40.1
OUTB
  Bottom 0.203: R43.1 35.42,30.43 35.42,48.42 36.75,49.75 36.75,55.23 36.84,55.32 36.84,61.34 38.62,63.12 U$4.2
OUTC
  Bottom 0.203: U$4.7 35.38,62.75 35.02,62.39 35.02,20.68 35.7,20 R46.1
OUTD
  Bottom 0.203: U$4.8 34.73,63.12 34.61,63.01 34.61,63 34.61,10.24 R49.1
REF_BIAS
  Bottom 0.203: R51.1 R52.2 44,52 44.4,52 45.86,50.54 45.86,49.69 45,48.83 45,39.03 44.8,38.83 44.8,38 | 44.8,38 44.8,37 | 44.8,37 44.8,33 | 44.8,33 44.8,32 | 44.8,32 44.8,30.2 44.91,30.09 44.91,12.4 44.8,12.29 44.8,11 | IC5.5 45.41,7.59 44.8,8.2 44.8,10 | 44.8,10 44.8,11 | 44.8,10 44.2,10.6 IC5.3 44.4,10.6 44.8,11 | 44.8,38 44.4,37.6 IC4.3 44.73,37 44.8,37 | 44.8,33 IC4.5 45.2,32.4 44.8,32
RESET  (via drill 0.4)  (1 unrouted)
  Top 0.203: 6.08,68.08 v6.17,68 5.82,68.35 | 5.82,68.35 6.08,68.08 | 6.08,68.08 5.82,68.35 | 5.82,68.35 5.82,77 5.82,78 5.82,78.48 5.7,78.6 5.7,79.3 6.17,79.77 15.23,79.77 v16,79 | v48,79.49 48,79.94 48.76,80.69 48.76,81.32 48.31,81.77 44.95,81.77 44.43,81.24 42.69,81.24 42.24,81.69 v42.24,85.27
  Bottom 0.203: C7.1 21,78 | 21,78 20,78 19.75,77.75 U1.7 16.25,77.75 16,78 v16,79 | R32.1 21.15,78.15 21,78 | SWD_CON.1 3.19,68 v6.17,68 | SV2.4 36.78,84.12 C40.1 41.1,84.12 v42.24,85.27 42.67,85.7 R50.1 | U3.7 48.26,79.75 v48,79.49
RLED_1
  Bottom 0.203: R5.2 3.4,78.25 7.37,78.25 7.38,78.24 8.01,78.24 8.02,78.25 U1.31
RLED_2
  Bottom 0.203: R7.2 24.15,75.15 23.7,74.7 23.7,73.23 22.51,72.04 21.89,72.04 20.73,73.19 20.47,73.19 20.2,73.47 20.2,75.9 19.85,76.25 U1.10
SCR_SCL  (via drill 0.4)
  Top 0.203: v13,84 15.77,86.77 U$2.3
  Bottom 0.203: U1.42 13.25,83.75 v13,84
SCR_SDA  (via drill 0.4)
  Top 0.203: v14.11,84.04 14.11,84.54 16.18,86.6 16.18,104.28 18.31,106.41 U$2.4
  Bottom 0.203: U1.43 13.75,83.68 v14.11,84.04
SDADC_1  (via drill 0.4)
  Top 0.203: v18,47 18.78,47.78 18.78,58.62 17.47,59.93 17.47,67.03 15.95,68.56 15.95,69.71 v13.49,72.16
  Bottom 0.203: U$1.14 19.69,46.09 19.31,45.71 17.01,45.71 16.15,44.85 C1.2 R23.2 16,42 15,43 15,45 17,47 v18,47 | U1.18 13.75,72.41 v13.49,72.16
SDADC_2  (via drill 0.4)
  Top 0.203: v27.9,40.4 27.9,59.1 26,61 26,62.42 24.19,64.23 22.72,64.23 22.04,64.92 22.04,69.29 21.44,69.89 21.44,73.46 18.6,76.3 16.42,76.3 v16,75.88
  Bottom 0.203: U$1.8 27.31,45.69 28,45 28,44.15 C2.2 R25.2 27.85,40.45 v27.9,40.4 | U1.20 12.75,74.75 13.88,75.88 v16,75.88
SDADC_3  (via drill 0.4)
  Top 0.203: v16,76.99 19.99,76.99 23,73.98 23,66.27 22.44,65.71 22.44,65.09 22.89,64.64 24.36,64.64 v27.11,61.89
  Bottom 0.203: U$1.7 27.31,53.91 27.85,54.45 C3.2 R29.2 27.85,58.85 28.34,59.34 28.34,60.66 v27.11,61.89 | U1.28 10.35,76.75 11.2,77.6 15.39,77.6 v16,76.99
SIGNAL_1  (via drill 0.4)
  Top 0.203: v9.88,25.78 9.88,27.88 v10.19,28.19 | v10.76,39.84 10.76,41.96 v11.2,42.4
  Bottom 0.203: IC1.8 9.81,42.04 R8.2 | R24.1 20,43.15 20,41.37 19.63,41 10.2,41 9.85,41.35 R8.2 | R15.1 9.88,24.97 v9.88,25.78 | v10.19,28.19 9.41,28.97 9.41,38.11 10.76,39.46 v10.76,39.84 | v11.2,42.4 10.8,42 R8.2
SIGNAL_2  (via drill 0.4)
  Top 0.203: v3.6,39.9 3.6,31.6 1.51,29.51 1.51,12.49 2.4,11.6 9.6,11.6 v12.5,8.7
  Bottom 0.203: R27.1 23.15,43.48 23.95,42.68 23.95,41.32 23.23,40.59 4,40.59 3.6,40.19 3.6,40 | IC1.14 2.15,44.86 R10.2 2.15,41.65 3.6,40.2 3.6,40 | 3.6,40 v3.6,39.9 3.6,40 | v12.5,8.7 11.65,7.85 R17.1
SIGNAL_3
  Bottom 0.203: IC1.7 9.85,50.14 R12.2 R19.1 14.95,49.9 23.5,49.9 24.11,50.51 24.11,55.05 R30.1
SPI_LDAC
  Bottom 0.203: U$4.16 39.27,71.2 39.95,71.88 39.95,77.25 40.45,77.75 U3.26
SPI_MOSI
  Bottom 0.203: U$4.11 36.02,71.1 35.66,71.47 35.66,74.53 35.83,74.7 37.33,74.7 38.47,75.84 39.19,75.84 39.55,76.2 39.55,77 39.55,77.42 40.38,78.25 U3.27
SPI_SCK
  Bottom 0.203: U$4.10 35.38,71.18 35.25,71.31 35.25,74.69 35.66,75.11 37.16,75.11 38.3,76.25 38.8,76.25 39.14,76.59 39.14,77.59 40.3,78.75 U3.28
SPI_SYNC
  Bottom 0.203: U$4.9 34.73,71.22 34.84,71.34 34.84,74.86 35.5,75.52 37,75.52 37.74,76.26 38.14,76.66 38.46,76.66 38.74,76.94 38.74,77.76 40.23,79.25 U3.29
SW_1  (via drill 0.4)
  Top 0.203: S1.P$2 6.75,36.25 7,36 10.49,36 13.3,38.81 13.3,55.7 15.13,57.53 15.13,68.7 12.29,71.54 12.29,72 12.29,73.8 12.75,74.25 12.75,74.99 v14.4,76.64
  Bottom 0.203: S1.P$2 S1.P$1 | v14.4,76.64 14.05,76.29 13.71,76.29 12.25,74.83 U1.21
SW_2  (via drill 0.4)
  Top 0.203: v19,39 19.59,39.59 19.59,58.96 18.29,60.26 18.29,68.22 18.46,68.39 18.46,69.15 v18.81,69.5
  Bottom 0.203: S2.P$1 S2.P$2 18.75,39.25 v19,39 | v18.81,69.5 18.5,69.81 18.5,70.57 16.87,72.21 15.67,72.21 15.25,72.62 U1.15
SW_3  (via drill 0.4)
  Top 0.203: S3.P$4 21.25,39.25 20.75,39.75 20.41,40.09 20.41,59.29 19.1,60.6 19.1,66.92 v19.45,67.28
  Bottom 0.203: S3.P$4 S3.P$3 | U1.13 16.25,73.17 16.4,73.02 17.2,73.02 19.98,70.25 19.98,68.07 19.45,67.55 v19.45,67.28
SWCLK  (via drill 0.4)  (1 unrouted)
  Top 0.203: SWD_CON.2 3,65.54 5,67.54 5,78.15 4.89,78.26 4.89,79.64 5,79.75 v5,81
  Bottom 0.203: U1.37 10.75,81.65 10.5,81.4 5.4,81.4 v5,81 | U3.37 42.75,83.55 42.6,83.4 39.73,83.4 39.66,83.32 37.15,83.32 SV2.3
SWDIO  (via drill 0.4)  (1 unrouted)
  Top 0.203: SWD_CON.3 5.41,65.14 5.41,78.31 5.29,78.43 5.29,79.47 6.1,80.27 v6.1,80.53
  Bottom 0.203: U1.34 8.55,79.75 8.15,80.15 7.77,80.53 v6.1,80.53 | SV2.2 38.12,81.75 U3.34
USB_DM  (via drill 0.4)
  Top 0.203: J1.2 43.41,95.34 43.41,82.7 v44.11,82
  Bottom 0.203: v44.11,82 42.86,80.75 U3.32
USB_DP  (via drill 0.4)
  Top 0.203: J1.3 43,92.55 v43,82
  Bottom 0.203: v43,82 42.25,81.25 U3.33
VCC  (via drill 0.4)
  Top 0.406: v22.2,72.8 v22.2,70.2
  Bottom 0.203: U1.25 10.05,75.25 10.75,74.55 U1.24 10.75,73.15 10.6,73 C14.2 C15.2 | C12.2 20.4,76.75 U1.9
  Bottom 0.406: C16.1 17,59.4 U$3.1 | C16.1 17.4,57.6 18.85,56.15 C29.2 20,55 20.5,54.5 23,54.5 23.5,54 U$1.4 | C16.1 18,59.6 | C15.2 8.85,70.15 11.8,67.2 16.8,67.2 18,66 | C12.2 C13.2 21,73.85 22.05,72.8 v22.2,72.8 | 18,59.6 C16.1 | 18,66 18,59.6 | 18,66 20,66 21,67 21,69 v22.2,70.2
VCCIO  (via drill 0.4)  (1 unrouted)
  Top 0.203: v24,79 20.4,79 20,79.4
  Top 0.406: v21.19,85.3 20,84.11 20,79.4 18.7,78.1 11.1,78.1 10,77 10,72.3 v10.06,72.24 | v41,85.76 41,72.4 v40.8,72.2 40.6,72 v39,72
  Bottom 0.203: U1.1 16.85,80.75 16.25,81.35 U1.48 16.25,82.95 16.8,83.5 C8.2 | R32.2 23.85,79 v24,79 | U1.17 14.25,72.47 15,71.72 C11.2 | U3.1 48.85,82.75 48.25,83.35 U3.48 48.25,84.85 48.9,85.5 C49.1 | U3.25 42.15,77.25 42.75,76.65 U3.24 42.75,75.15 42.3,74.7 41.17,74.7 C48.1 | U$4.13 U$4.12 36.67,71.95 C57.1 | U3.17 46.25,75 45.95,74.7 42.9,74.7 41.7,73.5 C50.1 | U3.9 50.75,78.75 51.8,79.8 C47.1
  Bottom 0.406: C9.2 18.15,86.15 19,87 20.39,87 21.19,86.19 | C18.2 26.85,90.85 25,89 25,88 24,87 22,87 21.19,86.19 | 21.19,86.19 v21.19,85.3 | C11.2 13.5,70.85 C10.2 13.28,71 12.37,71.91 10.39,71.91 v10.06,72.24 | U$5.1 C35.1 | C47.1 50.12,83.8 C49.1 49.33,86.3 45.75,86.3 R50.2 45,85.85 C35.1 | C48.1 C50.1 40.88,72.28 v40.8,72.2 | C35.1 42.82,87.5 42.81,87.49 42.73,87.49 v41,85.76 | v39,72 36.62,72 C57.1
  Bottom 0.508: C9.2 C8.2
  Bottom 0.813: C18.2 27.4,91.55 C19.1 27.4,97.56 U5.3 28,99.96 28,105 27,106 23,106 20,103 C32.2 17.4,103.6 16,105 14,105 13.23,105.77 U$2.2
VREF_-10  (via drill 0.4)
  Top 0.406: v22,57 v22,41.35
  Bottom 0.406: R33.1 23.1,68.95 U2.2 26.15,68.95 U2.3 26.85,67.75 C24.2 26.85,62.85 23.15,59.15 R31.1 22.15,57 v22,57 | R26.1 21.5,41.35 v22,41.35 22.5,41.35 R28.1

## Text on the board
bPlace: RED STRIPE | v0.1 | v0.1